# Altium PCB CTRL.PcbDoc
Units mm, origin at the board's own origin, x right, y up, seen from the top; angles counter-clockwise.
Board outline 30 x 23 mm, 2 copper layers (Top Layer, Bottom Layer), stack 1.576 mm thick; 24 components, 19 nets, 74 pads, 114 vias.
Unrouted connection lines stored in the file: 15.
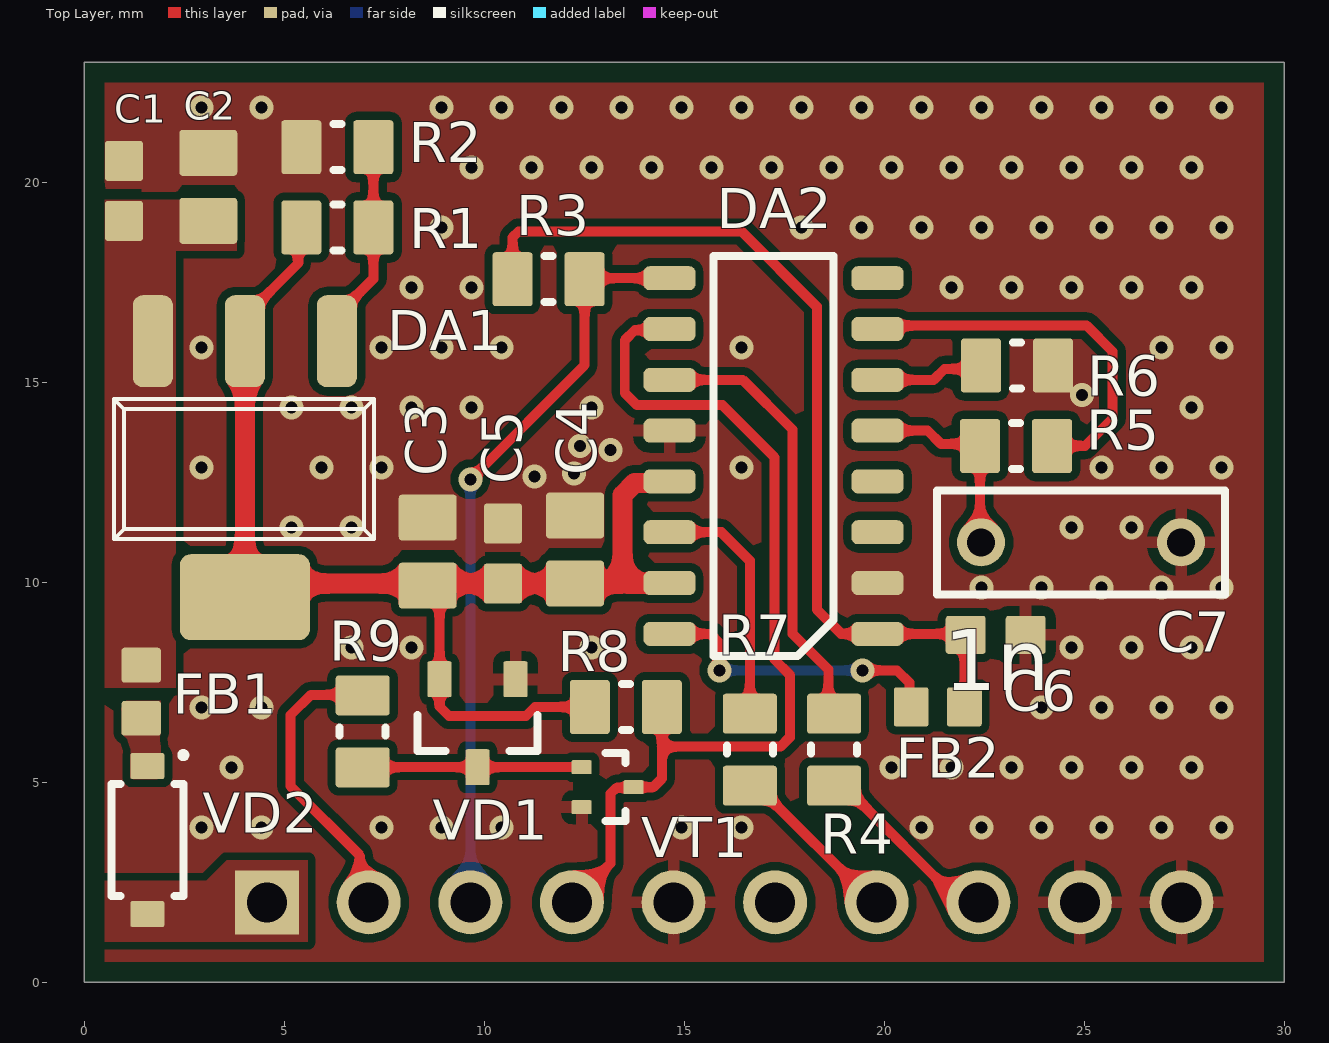
[diagram p0: Top Layer view]
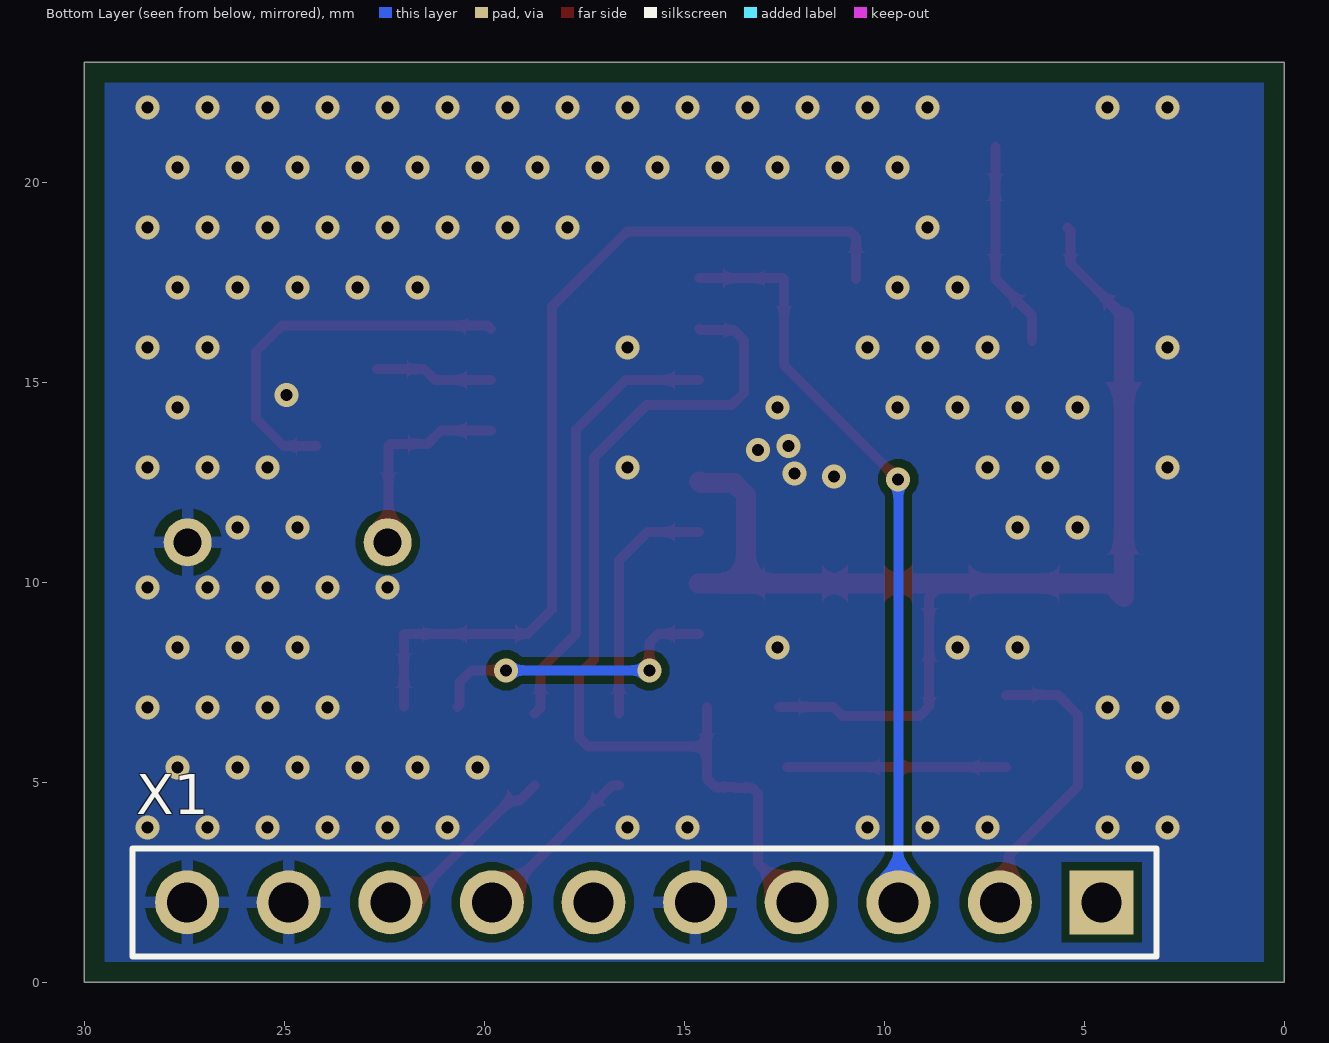
[diagram p1: Bottom Layer view, seen from below]
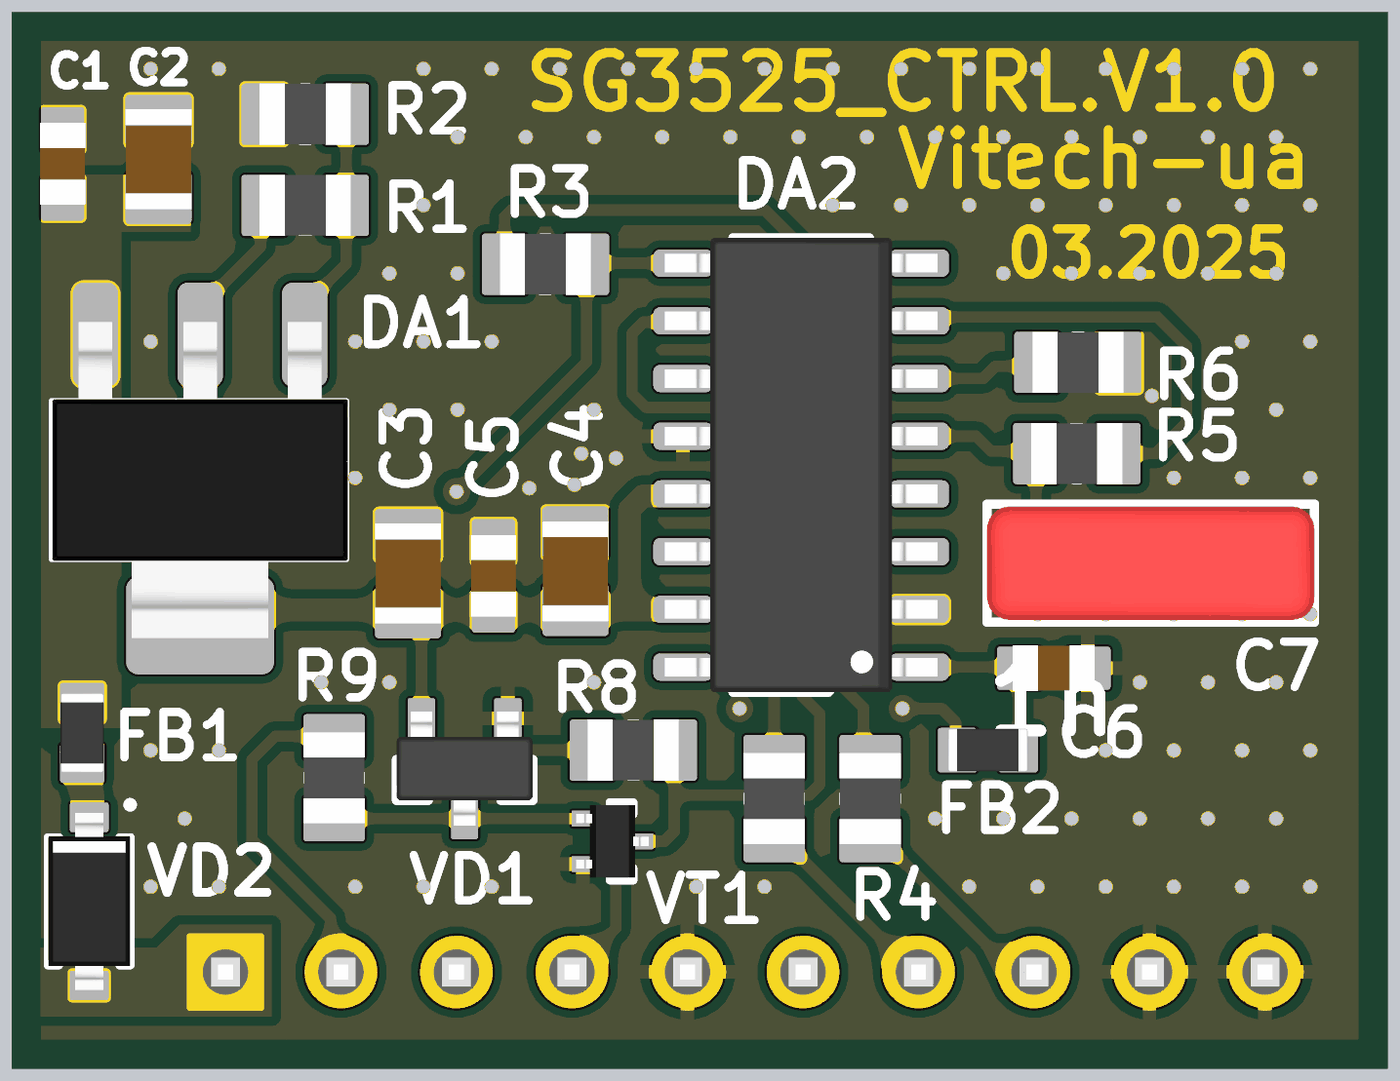
[diagram p2: 3D render of the assembled board from above, using the file's embedded part models]

## Layer stack, top to bottom
Top Solder: solder mask 0.012, Solder Resist, Dk 3.5
Top Layer: signal copper 0.038
Dielectric 1: dielectric 1.5, FR-4, Dk 4.8
Bottom Layer: signal copper 0.038
Bottom Solder: solder mask 0.012, Solder Resist, Dk 3.5

## Board outline
0,0 0,23 30,23 30,0

## Design rules (kind name [scope] priority, off if disabled: settings)
BoardOutlineClearance [All] p1: gap=0.5 ignorepadtopadclearanceinfootprint=FALSE
Clearance MiddleVoltage [InNetClass('MiddleVoltage')] p1: gap=0.5 ignorepadtopadclearanceinfootprint=FALSE except(0: Arc-Hole Track-Hole SMDPad-Hole THPad-Hole Via-Hole Fill-Hole Poly-Hole Region-Hole Text-Hole; 0.2: Arc-Text Track-Text SMDPad-Text THPad-Text Via-Text Fill-Text Poly-Text Region-Text Text-Text)
Clearance HighVoltage [InNetClass('HighVoltage')] p2: gap=1 ignorepadtopadclearanceinfootprint=FALSE except(0: Arc-Hole Track-Hole SMDPad-Hole THPad-Hole Via-Hole Fill-Hole Poly-Hole Region-Hole Text-Hole; 0.2: Arc-Text Track-Text SMDPad-Text THPad-Text Via-Text Fill-Text Poly-Text Region-Text Text-Text)
Clearance Standart [All] p3: gap=0.2 ignorepadtopadclearanceinfootprint=FALSE except(0: Arc-Hole Track-Hole SMDPad-Hole THPad-Hole Via-Hole Fill-Hole Poly-Hole Region-Hole Text-Hole)
ComponentClearance [All] p1: gap=0.1 collisioncheckmode=3 verticalgap=0.1 showdistances=TRUE
Height [All] p1: minheight=0 maxheight=40 prefheight=12.7
HoleSize [All] p1: absolutevalues=TRUE maxlimit=12 minlimit=0.3 maxpercent=80.000 minpercent=20.000
HoleToHoleClearance [All] p1: gap=0.3 allowstackedmicrovias=TRUE
MinimumSolderMaskSliver [All] p1: minsoldermaskwidth=0.1
NetAntennae [All] p1: netantennaetolerance=2
PlaneClearance [All] p1: clearance=0.3
PlaneConnect PlaneConnectMiddleCurrent [InNetClass('MiddleCurrent')] p1: planeconnectstyle=Relief reliefexpansion=0.508 reliefentries=4 reliefconductorwidth=0.5 reliefairgap=0.3
PlaneConnect PlaneHighCurrent [InNetClass('HighCurrent')] p2: planeconnectstyle=Relief reliefexpansion=0.508 reliefentries=4 reliefconductorwidth=0.5 reliefairgap=0.35
PlaneConnect [All] p3: planeconnectstyle=Relief reliefexpansion=0.508 reliefentries=4 reliefconductorwidth=0.3 reliefairgap=0.3
PolygonConnect PolygonConnectMiddleCurrent [All vs InNetClass('MiddleCurrent')] p1: connectstyle=Relief reliefconductorwidth=0.4 reliefentries=4 polygonreliefangle="90 Angle" airgapwidth=0.3
PolygonConnect PolygonHighCurrent [InNetClass('HighCurrent')] p2: connectstyle=Relief reliefconductorwidth=0.5 reliefentries=4 polygonreliefangle="90 Angle" airgapwidth=0.3
PolygonConnect PolygonConnect_Keepout [(ObjectKind = 'Track') And (Layer = 'KeepOutLayer')] p3: connectstyle=Direct reliefconductorwidth=0.254 reliefentries=4 polygonreliefangle="90 Angle" airgapwidth=0.254
PolygonConnect PolygonConnect_Via [IsVia] p4: connectstyle=Direct reliefconductorwidth=0.254 reliefentries=4 polygonreliefangle="90 Angle" airgapwidth=0.254
PolygonConnect [All] p5: thpad.connectstyle=Relief thpad.reliefconductorwidth=0.3 thpad.reliefentries=4 thpad.polygonreliefangle="90 Angle" thpad.airgapwidth=0.25 smdpad.connectstyle=Relief smdpad.reliefconductorwidth=0.3 smdpad.reliefentries=4 smdpad.polygonreliefangle="90 Angle" smdpad.airgapwidth=0.25 via.connectstyle=Direct via.reliefconductorwidth=0.3 via.reliefentries=4 via.polygonreliefangle="90 Angle" via.airgapwidth=0.3
RoutingCorners [All] p1: cornerstyle=45-Degree minsetback=1 maxsetback=3
RoutingVias Power [InNetClass('Power')] p1: holewidth=0.8 width=1.5 viastyle="Through Hole" minholewidth=0.5 minwidth=1 maxholewidth=1.2 maxwidth=3
RoutingVias [All] p2: holewidth=0.4 width=0.8 viastyle="Through Hole" minholewidth=0.3 minwidth=0.6 maxholewidth=0.5 maxwidth=1
SilkToSilkClearance [All] p1: silktosilkclearance=0
SilkToSolderMaskClearance [IsPad] p1: minsilkscreentomaskgap=0.05 clearancetoexposedcopper=TRUE
SolderMaskExpansion SolderMaskExpansion_VIA [IsVia] p1: expansion=-3 istentingtop=TRUE useseparateexpansions=TRUE expansionbottom=-3 istentingbottom=TRUE
SolderMaskExpansion [All] p2: expansion=0.05 istentingtop=FALSE
SupplyNets "Schematic Supply Nets_3" [InNet('+VSG')] p1: voltage=0.000
SupplyNets "Schematic Supply Nets_2" [InNet('GND')] p2: voltage=0.000
SupplyNets "Schematic Supply Nets_1" [InNet('5VREF')] p3: voltage=0.000
SupplyNets "Schematic Supply Nets" [InNet('+VBAT')] p4: voltage=0.000
Width Width_ANT [InNetClass('Anthenna')] p1: maxlimit=1.641 minlimit=0.2 preferedwidth=1.641
Width WidthMiddleCurrent [InNetClass('MiddleCurrent')] p2: maxlimit=2 minlimit=0.35 preferedwidth=0.5
Width WidthHighCurrent [InNetClass('HighCurrent')] p3: maxlimit=5 minlimit=0.5 preferedwidth=1
Width [All] p4: maxlimit=0.5 minlimit=0.2 preferedwidth=0.25
19 further rules are at their usual default settings.

## Components (designator, comment, footprint, x,y, rotation, side; value= is the part's Value field where it differs from the comment)
C1 "0.1uF" C_CERAMIC_0603_MED 0.991,19.787 r90 top
C2 "10uF" CAP-0805(2012)X125T20 3.099,19.888 r90 top
C3 "10uF" CAP-0805(2012)X85T10 8.585,10.77 r90 top
C4 "10uF" CAP-0805(2012)X85T10 12.268,10.82 r90 top
C5 "0.1uF" C_CERAMIC_0603_MED 10.465,10.719 r90 top
C6 "0.1uF" C_CERAMIC_0603_MED 22.784,8.687 r180 top
C7 "1n" "CAP: MKS2 (W=2.50MM)" 24.917,10.998 r180 top
DA1 "LD1117STR" SOT-223 4.013,12.827 r180 top
DA2 "UC3525" SOIC-16 17.23,13.157 r90 top
FB1 "BLM18KG331SH1D" BLM18-Series_H80T15 1.422,7.264 r90 top value="330 Ohms @ 100MHz"
FB2 "BLM18KG331SH1D" BLM18-Series_H80T15 21.336,6.883 r0 top value="330 Ohms @ 100MHz"
R1 "27" R_ANY_CHIP_0805_MED 6.325,18.872 r180 top
R2 "240" R_ANY_CHIP_0805_MED 6.325,20.879 r0 top
R3 "1k" R_ANY_CHIP_0805_MED 11.608,17.577 r180 top
R4 "22" R_ANY_CHIP_0805_MED 18.745,5.817 r270 top
R5 "120" R_ANY_CHIP_0805_MED 23.292,13.411 r180 top
R6 "15k" R_ANY_CHIP_0805_MED 23.317,15.418 r180 top
R7 "22" R_ANY_CHIP_0805_MED 16.637,5.817 r270 top
R8 "15k" R_ANY_CHIP_0805_MED 13.538,6.883 r180 top
R9 "1k" R_ANY_CHIP_0805_MED 6.96,6.274 r90 top
VD1 "BAV99LT3G" SOT-23_MED 9.83,6.477 r90 top
VD2 "1N5819HW" SOD-123_MED 1.575,3.556 r270 top
VT1 "DTC143ZET1G" SOT-416 13.081,4.877 r270 top
X1 "PLS-10 (Part of PLS-40)" DS1021-10S 16,2 r0 bottom

## Footprints (in the part's own frame and the unit in brackets; to place one, negate y for a bottom-side part, rotate by r counter-clockwise, add the part's x,y. Pads: shape width x height; smd on the part's side, far side on the other; paste and mask are expansions set on the pad)
BLM18-Series_H80T15 [mm] "Chip Inductor, 2-Leads, Body 1,60x0,80mm, IPC Medium Density"
  rrect15% 0.87x0.98 smd mask+0.05: 1(-0.665,0) 2(0.665,0)
  body extent -0.87,-0.47 0.88,0.48, height 0.95
C_CERAMIC_0603_MED [mm] "Chip Capacitor, 2-Leads, Body 1,60x0,80mm, IPC Medium Density"
  rrect15% 1x0.95 smd mask+0.05: 1(-0.75,0) 2(0.75,0)
  Top Layer pour cut-out: -0.05,0.45 0.05,0.45 0.05,-0.45 -0.05,-0.45
  body extent -0.9,-0.5 0.9,0.5, height 0.9
CAP-0805(2012)X85T10 [mm] "Chip Capacitor, 2-Leads, Body 2,00x1,25mm, IPC Medium Density"
  rrect15% 1.15x1.45 smd mask+0.05: 1(-0.85,0) 2(0.85,0)
  Top Layer pour cut-out: -0.05,0.651 0.05,0.651 0.05,-0.649 -0.05,-0.649
  body extent -1.1,-0.72 1.1,0.73, height 0.95
CAP-0805(2012)X125T20 [mm] "Chip Capacitor, 2-Leads, Body 2,00x1,25mm, IPC Medium Density"
  rrect15% 1.15x1.45 smd mask+0.05: 1(-0.85,0) 2(0.85,0)
  Top Layer pour cut-out: -0.05,0.651 0.05,0.651 0.05,-0.649 -0.05,-0.649
  body extent -1.1,-0.72 1.1,0.73, height 1.45
"CAP: MKS2 (W=2.50MM)" [mm]
  round 1.2 hole 0.7: 1(-2.5,0) 2(2.5,0)
  silkscreen extent -3.6,-1.3 3.6,1.3, body extent -3.6,-1.25 3.6,1.25, height 6.5
DS1021-10S [mm] "2.54mm 10-pin One Row Male Header, PLS-10"
  rect 1.6x1.6 hole 1: 1(-11.43,0)
  round 1.6 hole 1: 2(-8.89,0) 3(-6.35,0) 4(-3.81,0) 5(-1.27,0) 6(1.27,0) 7(3.81,0) 8(6.35,0) 9(8.89,0) 10(11.43,0)
  silkscreen extent -12.8,-1.35 12.8,1.35, body extent -12.7,-1.27 12.7,1.27, height 8.64
R_ANY_CHIP_0805_MED [mm] "Chip Resistor, 2-Leads, Body 2,00x1,25mm, IPC Medium Density"
  rrect15% 1x1.35 smd: 1(-0.9,0) 2(0.9,0)
  silkscreen extent -0.1,-0.58 0.1,0.58, body extent -1,-0.67 1,0.68, height 0.6
SOD-123_MED [mm] "SOD-123, 2-Leads, Body 1,60x3,71mm, IPC Medium Density"
  rrect15% 0.65x0.85 smd mask+0.05: AN(1.85,0) CA(-1.85,0)
  silkscreen extent -2.2,-0.9 1.4,0.97, body extent -1.95,-0.9 1.95,0.9, height 1.18
SOIC-16 [mm]
  rrect50% 0.6x1.3 smd mask+0.05: 1(-4.445,-2.6) 2(-3.175,-2.6) 3(-1.905,-2.6) 4(-0.635,-2.6) 5(0.635,-2.6) 6(1.905,-2.6) 7(3.175,-2.6) 8(4.445,-2.6) 9(4.445,2.6) 10(3.175,2.6) 11(1.905,2.6) 12(0.635,2.6) 13(-0.635,2.6) 14(-1.905,2.6) 15(-3.175,2.6) 16(-4.445,2.6)
  silkscreen extent -5,-1.5 5,1.5, body extent -5,-3 5,3, height 1.75
SOT-23_MED [mm] "SOT23, 3-Leads, Body 2,92x2,37mm, Pitch 0,95mm, IPC Medium Density"
  rrect15% 0.9x0.6 smd mask+0.05: 1(1.1,-0.95) 2(1.1,0.95) 3(-1.1,0)
  silkscreen extent -0.7,-1.5 0.2,1.5, body extent -1.25,-1.5 1.25,1.5, height 1.1
SOT-223 [mm]
  rrect50% 1x2.3 smd mask+0.05: 1(-2.3,-3.2) 2(0,-3.2) 3(2.3,-3.2)
  rrect25% 3.25x2.15 smd mask+0.05: 4(0,3.2)
  silkscreen extent -3.22,-1.75 3.28,1.75, body extent -3.25,-3.48 3.25,3.48, height 1.68
SOT-416 [mm]
  rrect15% 0.35x0.5 smd mask+0.05: 1(-0.5,-0.65) 2(0.5,-0.65) 3(0,0.65)
  silkscreen extent -0.85,-0.05 0.85,0.45, body extent -0.8,-0.8 0.8,0.8, height 0.78

## Part data
C1 C5 C6: library part CL10B104KB8NNNC, "100nF 50V X7R ±10% 0603 Ceramic Capacitor RoHS", Dielectric Type=X7R, Manufacturer="Samsung Electro-Mechanics", Package=0603, Supplier Part Number 1=1276-1000-2-ND, Temperature Range="-55°C ~ 125°C", Tolerance=±10%, Voltage=50V, Ajax_1C_ID=15653, Ajax_1C_PN="100nF 50V X7R 10% 0603 CL10B104KB8NNNC ceramic capacitor SMD", Ajax_1С_Status="Mass Production", Component Status=Released, Component Type=SMD, ComponentLink1Description=Datasheet, ComponentLink1URL=https://media.digikey.com/pdf/Data%20Sheets/Samsung%20PDFs/CL_Series_MLCC_ds.pdf, GUID_1C=28d36f8f-5d05-11e9-ab4e-0050569f2651, Part Number=CL10B104KB8NNNC, Part Type="Ceramic / X7R / 0603", Price=0.00273, Replacement=CL10B104KB8NNND, Standard Lead Time="18 Weeks", Supplier 1=Digi-Key
C2: library part C2012X5R1V106K125AC, "10uF 35V X5R ±10% 0805 Low ESL Ceramic Capacitor RoHS", Dielectric Type=X5R, Manufacturer="TDK Corporation", Package=0805, Supplier Part Number 1=445-14418-2-ND, Temperature Range="-55°C ~ 85°C", Tolerance=±10%, Voltage=35V, Ajax_1C_ID=29369, Ajax_1C_PN="10uF 35V X5R 10% 0805 C2012X5R1V106K125AC TDK Ceramic Capacitor SMD RoHS", Ajax_1С_Status=Substitution, Component Status=Released, Component Type=SMD, ComponentLink1Description=Datasheet, ComponentLink1URL=https://product.tdk.com/system/files/dam/doc/product/capacitor/ceramic/mlcc/catalog/mlcc_commercial_general_en.pdf, GUID_1C=b7f6aaac-a81d-11eb-ab74-0050569f2651, Part Number=C2012X5R1V106K125AC, Part Type="Ceramic / X5R / 0805", Price=0.04568564, Replacement=NONE, Standard Lead Time="28 Weeks", Supplier 1=Digi-Key
C3 C4: library part C2012X5R1E106M085AC, "10uF 25V X5R ±20% 0805 Ceramic Capacitor RoHS", Dielectric Type=X5R, Manufacturer="TDK Corporation", Package=0805, Supplier Part Number 1=445-14388-1-ND, Temperature Range="-55°C ~ 85°C", Tolerance=±20%, Voltage=25V, Ajax_1C_ID=13798, Ajax_1C_PN="10uF 25V X5R 20% 0805 C2012X5R1E106M085AC Ceramic Capacitor SMD RoHS", Ajax_1С_Status=Substitution, Component Status=Released, Component Type=SMD, ComponentLink1Description=Datasheet, ComponentLink1URL=https://product.tdk.com/info/en/catalog/datasheets/mlcc_commercial_general_en.pdf, GUID_1C=d6f4b954-ba78-11e8-ab45-005056918265, Part Number=C2012X5R1E106M085AC, Part Type="Ceramic / X5R / 0805", Price=0.16, Replacement=NONE, Standard Lead Time="12 Weeks", Supplier 1=Digi-Key
C7: library part CAP_NON_POLAR_THT, "Multilayer Ceramic Capacitors MLCC - SMD/SMT 10 uF 25 VDC 10% 1206 X7R", Manufacturer=Murata, Package=1206, Part Number=GRM31CR71E106KA12L, Tolerance="10 %", Voltage=*V, Component Type=THT, ComponentLink1Description=Datasheet, ComponentLink1URL=https://eu.mouser.com/datasheet/2/281/1/GRM31CR71E106KA12_01CA-1987921.pdf
DA1: "Adjustable Low Drop Positive Voltage Regulator, 1.25V to 15V, 800mA", Manufacturer=STMicroelectronics, Package=SOT-223, Supplier Part Number 1=497-1244-2-ND, Temperature Range="0°C ~ 125°C", Ajax_1C_ID=9610, Ajax_1C_PN="LD1117STR SOT223 стабилизатор", Ajax_1С_Status="Mass Production", Component Status=Released, Component Type=SMD, ComponentLink1Description=Datasheet, ComponentLink1URL=https://www.st.com/content/ccc/resource/technical/document/datasheet/99/3b/7d/91/91/51/4b/be/CD00000544.pdf/files/CD00000544.pdf/jcr:content/translations/en.CD00000544.pdf, GUID_1C=cf96a4d2-0495-11e7-82cc-d8cb8a9acc66, Part Number=LD1117STR, Part Type="Power / Linear Regulator", Price=0.11978409, Replacement=NONE, Standard Lead Time="14 Weeks", Supplier 1=Digi-Key
DA2: "Buck, Push-Pull Regulator Positive Output Step-Down, Step-Up/Step-Down DC-DC Controller IC 16-DIP/16-SOIC", Manufacturer=Texas, Package=DIP16, Part Number=UC3825, Supplier Part Number 1=1727-6049-2-ND, Temperature Range="-40°C ~ 125°C", Component Status=Released, Component Type=SMD, ComponentLink1Description=Datasheet, ComponentLink1URL=https://assets.nexperia.com/documents/data-sheet/74HC_HCT4051.pdf, GUID_1C=956a5446-e932-11eb-ab74-0050569f2651, Part Type="IC REG CTRLR BCK/PUSH-PULL", Price=0.11383574, Replacement=NONE, Standard Lead Time="8 Weeks", Supplier 1=Digi-Key
FB1 FB2: "330 Ohms @ 100 MHz Power Line Ferrite Bead 0603, 1.7A 80mOhm", Current=1.7A, Manufacturer="Murata Electronics", Package=0603, Saturation Current=NONE, Supplier Part Number 1=490-13257-2-ND, Temperature Range="-55°C ~ 125°C", Tolerance=±25%, Ajax_1C_ID=31487, Ajax_1C_PN="330R 1.7A BLM18KG331SH1D 0603 Murata Ferrite Bead", Ajax_1С_Status="RND Only", Component Status=Released, Component Type=SMD, ComponentLink1Description=Datasheet, ComponentLink1URL=https://www.murata.com/en-us/products/productdata/8796737273886/QNFA9101.pdf, GUID_1C=8fa34a67-d98f-11eb-ab74-0050569f2651, Part Number=BLM18KG331SH1D, Part Type="Ferrite Bead", Price=0.0072, Replacement=NONE, Standard Lead Time="15 Weeks", Supplier 1=Digi-Key
R1 R2 R3 R4 R5 R6 R7 R8 R9: library part RC0805JR-0722RL, "22 Ohms ±5%, 1/8W 0805 Thick Film Resistor", Manufacturer=Yageo, Package=0805, Power Rating=0.125W, Temperature Range="-55°C ~ 155°C", Temperature Stability=±100ppm/°C, Tolerance=±5%, Voltage=150V, Ajax_1C_ID=8822, Ajax_1C_PN="22R 5% 0805 Resistors SMD RoHS", Ajax_1С_Status="Mass Production", Component Status=Released, Component Type=SMD, ComponentLink1Description=Datasheet, ComponentLink1URL=https://eu.mouser.com/datasheet/2/447/PYu_RC_Group_51_RoHS_L_10-1664068.pdf, GUID_1C=3ba40fec-5951-11e6-81ec-d8cb8a9acc66, Part Number=RC0805JR-0722RL, Part Type="Thick Film", Price=0.0011, Replacement=NONE
VD1: "Diode Array 1 Pair Series Connection, Standard, 100V, 215mA (DC), SOT-23", Current=215mA, Manufacturer=Onsemi, Package=SOT-23, Supplier Part Number 1=863-BAV99LT3G, Temperature Range="-65°C ~ 150°C", Voltage=100V, Ajax_1C_ID=73369, Ajax_1C_PN="70V 215mA BAV99LT3G SOD-23-3 Onsemi Diode SMD RoHS", Ajax_1С_Status="RND Only", Component Status=Released, Component Type=SMD, ComponentLink1Description=Datasheet, ComponentLink1URL=https://eu.mouser.com/datasheet/2/308/1/BAV99LT1_D-2310219.pdf, GUID_1C=9467e0da-0e79-11ee-a36c-005056994834, Marking="A7 M*", Part Number=BAV99LT3G, Part Type=Array, Price=0.04, Replacement=NONE, Standard Lead Time="36 Weeks", Supplier 1=Mouser, Vf="1.25V @ 150 mA"
VD2: library part BAS116GWJ, "Diode Standart 75V 215mA, SOD-123", Current=0.215A, Manufacturer="Nexperia USA", Package=SOD-123, Supplier Part Number 1=1727-7322-2-ND, Temperature Range="-55°C ~ 150°C", Voltage=75V, Ajax_1C_ID=105914, Ajax_1C_PN="BAS116GWJ 85V 215mA Nexperia diode", Ajax_1С_Status="RND Only", Component Status="On Review", Component Type=SMD, ComponentLink1Description=Datasheet, ComponentLink1URL=https://eu.mouser.com/datasheet/2/916/BAS116GW-1318917.pdf, Marking=GB, Part Number=1N5819HW, Part Type=General, Price=NONE, Replacement=NONE, Standard Lead Time="8 Weeks", Supplier 1=Digi-Key, Vf="1.25 V @ 150 mA"
VT1: "50V, 100mA Low Vce(sat) NPN Digital Transistor, Pre-Biased 4.7k/47k (with built-in resistors)", Manufacturer=Onsemi, Package=SC-75, Supplier Part Number 1=DTC143ZET1GOSTR-ND, Temperature Range="-55°C ~ 150 °C", Ajax_1C_ID=9410, Ajax_1C_PN="DTC143ZET1G SC-75-3  биполярный NPN транзистор", Ajax_1С_Status="Mass Production", Component Status=Released, Component Type=SMD, ComponentLink1Description=Datasheet, ComponentLink1URL=http://www.onsemi.com/pub/Collateral/DTC143Z-D.PDF, GUID_1C=d76ac5d5-de69-11e6-829b-d8cb8a9acc66, Ic=100mA, Part Number=DTC143ZET1G, Part Type=NPN, Price=0.015, Replacement=NONE, Standard Lead Time="8 Weeks", Supplier 1=Digi-Key, Vce=50V
X1: library part DS1021-10SF11, "10 Pin 2.54mm Male Header, Vertical, 3mm and 6.1mm, PLS-5", Manufacturer=Connfly, Temperature Range="-40°C ~ 105°C", Component Status=Released, Component Type=PTH, ComponentLink1Description=Datasheet, ComponentLink1URL=\\altiumdb.ajax.local\files\Datasheet\Connectors\DS1021.pdf, Part Number=DS1021-10SF11, Part Type="Header / Male Pin / Single Row", Price=0.001875, Replacement=NONE, System=Connector

## Via types
v1: diameter 0.6, hole 0.3, Top Layer to Bottom Layer, tented both sides, 114 vias

## Nets (pads, with @x,y where several pads share a name; then routed paths per layer and width w, separated by ;. In a path a pad name is that pad's centre, name@x,y a point inside that pad or via, vN(x,y) a via of type N, cw(c..) or ccw(c..) an arc to the next point about the centre after c; other vN are vias at no path point)
5VREF: C6.2 DA2.1 FB2.2 R3.2 | length 22.8
  Top Layer w0.25: R3.2 10.708,18.624 10.854,18.771 16.434,18.771 18.313,16.891 18.313,9.322 18.923,8.712 22.008,8.712 FB2.2@22.008,6.891
+VBAT: FB1.1 VD2.CA
+VSG: C3.1 C4.1 C5.1 DA1.2 DA1.4 DA2.13 DA2.15 R1.2 R8.2 VD1.2 | length 31.2
  Top Layer w0.25: DA1.2@4.013,16.637 5.345,17.969 5.345,18.792 R1.2 ; C3.1 8.88,9.625 VD1.2 8.88,6.894 9.117,6.657 11.043,6.657 11.269,6.883 R8.2
  Top Layer w0.5: DA1.2@4.013,16.637 DA1.4 4.355,9.969 C5.1 C4.1 ; C4.1 13.459,9.97 ; DA2.13 14.587,12.478 13.751,12.478 13.459,12.185 13.459,9.97 ; DA2.15@14.649,9.97 13.459,9.97
cEN: R9.2 X1.2 | length 7.5
  Top Layer w0.25: R9.2 6.945,7.188 5.664,7.188 5.156,6.68 5.156,4.902 6.883,3.175 6.883,2.227 X1.2
COMP: DA2.9 R3.1 X1.3 | length 18.9
  Top Layer w0.25: v1(9.652,12.573) 12.508,15.429 R3.1 12.533,17.602 DA2.9
  Bottom Layer w0.25: X1.3 9.651,2.001 v1(9.652,12.573) v1(9.652,12.573)
G1: R4.2 X1.8 | length 4.8
  Top Layer w0.25: R4.2 19.12,4.542 19.36,4.542 21.643,2.258 22.092,2.258 X1.8
G2: R7.2 X1.7 | length 4.4
  Top Layer w0.25: R7.2 16.812,4.917 19.729,2 X1.7
GND: C1.2 C2.2 C3.2 C4.2 C5.2 C6.1 C7.1 DA2.2 DA2.12 R2.1 R6.1 VD1.1 VT1.2 X1.5 X1.9 X1.10
  other v1: 2.925,3.876 4.425,3.876 7.425,3.876 8.925,3.876 10.425,3.876 14.925,3.876 16.425,3.876 20.925,3.876 22.425,3.876 23.925,3.876 25.425,3.876 26.925,3.876 28.425,3.876 3.675,5.376 20.175,5.376 21.675,5.376 23.175,5.376 24.675,5.376 26.175,5.376 27.675,5.376 2.925,6.876 4.425,6.876 23.925,6.876 25.425,6.876 26.925,6.876 28.425,6.876 6.675,8.376 8.175,8.376 12.675,8.376 24.675,8.376 26.175,8.376 27.675,8.376 22.425,9.876 23.925,9.876 25.425,9.876 26.925,9.876 28.425,9.876 5.175,11.376 6.675,11.376 24.675,11.376 26.175,11.376 11.252,12.649 12.243,12.725 2.925,12.876 5.925,12.876 7.425,12.876 16.425,12.876 25.425,12.876 26.925,12.876 28.425,12.876 13.157,13.31 12.395,13.411 5.175,14.376 6.675,14.376 8.175,14.376 9.675,14.376 12.675,14.376 27.675,14.376 24.943,14.681 2.925,15.876 7.425,15.876 8.925,15.876 10.425,15.876 16.425,15.876 26.925,15.876 28.425,15.876 8.175,17.376 9.675,17.376 21.675,17.376 23.175,17.376 24.675,17.376 26.175,17.376 27.675,17.376 8.925,18.876 17.925,18.876 19.425,18.876 20.925,18.876 22.425,18.876 23.925,18.876 25.425,18.876 26.925,18.876 28.425,18.876 9.675,20.376 11.175,20.376 12.675,20.376 14.175,20.376 15.675,20.376 17.175,20.376 18.675,20.376 20.175,20.376 21.675,20.376 23.175,20.376 24.675,20.376 26.175,20.376 27.675,20.376 2.925,21.876 4.425,21.876 8.925,21.876 10.425,21.876 11.925,21.876 13.425,21.876 14.925,21.876 16.425,21.876 17.925,21.876 19.425,21.876 20.925,21.876 22.425,21.876 23.925,21.876 25.425,21.876 26.925,21.876 28.425,21.876
NetC1_1: C1.1 C2.1 DA1.3 FB1.2
NetC7_2: C7.2 DA2.5 R5.2 | length 5.2
  Top Layer w0.25: DA2.5 21.082,13.792 21.412,13.462 22.341,13.462 R5.2 22.392,10.998 C7.2
NetDA1_1: DA1.1 R1.1 R2.2 | length 5.2
  Top Layer w0.25: DA1.1 6.313,16.677 7.225,17.588 R1.1 R2.2
NetDA2_6: DA2.6 R6.2 | length 3
  Top Layer w0.25: DA2.6 21.234,15.062 21.506,15.334 R6.2@22.689,15.334
NetDA2_7: DA2.7 R5.1 | length 9.7
  Top Layer w0.25: DA2.7 19.916,16.418 25.06,16.418 25.705,15.773 25.705,14.097 25.019,13.411 R5.1
NetDA2_11: DA2.11 R4.1 | length 11.1
  Top Layer w0.25: DA2.11 16.459,15.062 17.704,13.818 17.704,8.712 18.599,7.817 18.599,6.863 R4.1
NetDA2_14: DA2.14 R7.1 | length 6.1
  Top Layer w0.25: DA2.14 15.926,11.252 16.637,10.541 R7.1
NetDA2_16: DA2.16 FB2.1 | length 7.5
  Top Layer w0.25: DA2.16 15.646,8.712 15.875,8.484 v1(15.875,7.798) ; v1(19.456,7.798) 20.32,7.798 20.625,7.493 20.625,6.93 FB2.1
  Bottom Layer w0.25: v1(15.875,7.798) v1(19.456,7.798)
NetR9_1: R9.1 VD1.3 VT1.1 | length 5.5
  Top Layer w0.25: R9.1 6.963,5.377 VD1.3 12.124,5.377 VT1.1
NetVD2_AN: VD2.AN X1.1
SHDN: DA2.10 R8.1 VT1.3 X1.4 | length 23.8
  Top Layer w0.25: X1.4 13.157,2.967 13.157,4.718 13.304,4.864 13.718,4.864 VT1.3 14.224,4.877 14.438,5.091 14.438,5.892 ; R8.1 14.438,5.892 ; DA2.10 14.603,16.305 13.765,16.305 13.511,16.051 13.511,14.734 13.818,14.427 15.951,14.427 17.254,13.125 17.254,8.07 17.637,7.687 17.637,6.126 17.403,5.892 14.438,5.892
pads on no net: DA2.3 DA2.4 DA2.8 X1.6

## Polygon pours and split planes (outlines as drawn)
GND on Top Layer "TOP_LAYER_GND_P003" (solid, pour order 3): 0,0 30,0 30,23 0,23
+VBAT on Top Layer "TOP_LAYER_+VBAT_P004" (solid, pour order 4): 0.889,7.036 1.905,7.036 1.905,5.156 1.829,5.08 0.965,5.08 0.889,5.156
NetVD2_AN on Top Layer "TOP_LAYER_NETVD2_AN_P001" (solid, pour order 1): 0.508,2.54 3.048,2.54 3.556,3.048 5.588,3.048 5.588,1.016 3.556,1.016 0.508,1.016
NetC1_1 on Top Layer "TOP_LAYER_NETC1_1_P000" (solid, pour order 0): 2.286,7.366 0,7.366 0,19.558 3.81,19.558 3.81,18.288 2.286,18.288
GND on Bottom Layer "BOTTOM_LAYER_GND_P002" (solid, pour order 2): 0,23 30,23 30,0 0,0

## Silkscreen, mask and mechanical layers (free items; w line width, h text height)
Top Solder:
  text "SG3525_CTRL.V1.0" at 11.046,21.025 h1.2
  text "Vitech-ua" at 19.225,19.326 h1.2
  text "03.2025" at 21.638,17.345 h1
Board:
  the board outline again, w0.254
Title:
  lines w0.1: 153.8,119.4 221.75,119.4
  lines w0.127: -89.879,-69.998 -84.799,-69.998 ; -89.879,0.487 -84.799,0.487 ; -89.879,70.972 -84.799,70.972 ; -40.603,-140.483 -40.603,-135.403 ; -40.603,136.377 -40.603,141.457 ; 8.546,-140.483 8.546,-135.403 ; 8.546,136.377 8.546,141.457 ; 57.695,-140.483 57.695,-135.403 ; 57.695,136.377 57.695,141.457 ; 106.971,-140.483 106.971,-135.403 ; 106.971,136.377 106.971,141.457 ; 149.725,-135.375 149.725,-105.375 298.725,-105.375 ; 149.725,-130.375 298.725,-130.375 ; 149.725,-125.375 298.725,-125.375 ; 149.725,-115.375 298.725,-115.375 ; 156.12,-140.483 156.12,-135.403 ; 156.12,136.377 156.12,141.457 ; 164.725,-125.375 164.725,-115.375 ; 205.269,-140.483 205.269,-135.403 ; 205.269,136.377 205.269,141.457 ; 234.725,-135.375 234.725,-125.375 ; 254.545,-140.483 254.545,-135.403 ; 254.545,136.377 254.545,141.457 ; 283.725,-125.375 283.725,-115.375 ; 298.741,-69.998 303.821,-69.998 ; 298.741,0.487 303.821,0.487 ; 298.741,70.972 303.821,70.972 ; -89.879,-140.483 303.821,-140.483 303.821,141.457 -89.879,141.457 -89.879,-140.483 ; -84.799,-135.403 298.741,-135.403 298.741,136.377 -84.799,136.377 -84.799,-135.403
  text "1" at -65.842,138.028 h1.78
  text "2" at -16.803,138.028 h1.78
  text "3" at 32.456,138.028 h1.78
  text "4" at 81.749,138.028 h1.78
  text "5" at 131.025,138.028 h1.78
  text "6" at 180.047,138.028 h1.78
  text "7" at 229.577,138.028 h1.78
  text "8" at 278.599,138.028 h1.78
  text "NOTES: UNLESS OTHERWISE SPECIFIED." at 155.2,120.45 h2.5
  text "1. MATERIAL:BASE MATERIAL LAMINATED EPOXY GLASS (ANY COLOR)" at 155.35,114.4 h2.5
  text "GRADE NEMA FR-4. ALL SIDES 1 OZ COPPER PER MIL-P-13949." at 161.95,109.9 h2.5
  text "AND IS UL APPROVED MFR SOURCE WITH 1.6 mm +-10 PERCENT" at 161.95,106.2 h2.5
  text "A" at -87.974,104.043 h1.78
  text "A" at 300.646,104.043 h1.78
  text "2. SOLDER PLATE PER QQ-S-571." at 155.35,101.9 h2.5
  text "3. SILKSCREEN IS ABSENT." at 155.35,97.9 h2.5
  text "4. DIMENSIONS IN MILLIMETERS, (...) - FOR REFERENCE," at 155.3,93 h2.5
  text "TOLERANCE ARE: +-0.15; HOLES: +- 0.05." at 162.45,88.95 h2.5
  text "5. LIQUID PHOTO IMAGABLE SOLDERMASK ENTHRONE DSR3241" at 155.35,84.9 h2.5
  text "OR ALTERNATIVE." at 162.45,80.95 h2.5
  text "6.  FOR REF ONLY: THIS BOARD HAS SMD ON BOTH SIDES." at 155.35,76.9 h2.5
  text "7.  THE FINISH OF THE BOARD IS HASL." at 155.2,70.5 h2.5
  text "8. PCB stackup:" at 155.2,64.8 h2.5
  text "B" at -87.974,33.431 h1.78
  text "B" at 300.646,33.431 h1.78
  text "C" at -87.974,-37.181 h1.78
  text "C" at 300.646,-37.181 h1.78
  text "D" at -87.974,-107.285 h1.78
  text "D" at 300.646,-107.285 h1.78
  text "TITLE:" at 150.7,-107.8 h1.2
  text "SIZE:" at 150.7,-117.55 h1.2
  text "DWG NO:" at 165.7,-117.55 h1.2
  text "REV:" at 285.2,-117.55 h1.2
  text ".Project_Version" at 290.4,-118.7 h2.5
  text "A3" at 156.7,-122.3 h2.5
  text "DATE:" at 150.7,-127.55 h1.2
  text "PCB DESIGNER:" at 236.2,-127.55 h1.2
  text ".PRINT_DATE" at 164.2,-128.8 h2.5
  text "FILE NAME:" at 150.7,-132.55 h1.2
  text "SHEET:" at 235.95,-132.55 h1.2
  text ".PCB_FILE_NAME_NO_PATH" at 164.2,-133.8 h2.5
  text "1 OF 1" at 253.95,-134.05 h2.5
  text "1" at -65.842,-138.832 h1.78
  text "2" at -16.803,-138.832 h1.78
  text "3" at 32.456,-138.832 h1.78
  text "4" at 81.749,-138.832 h1.78
  text "5" at 131.025,-138.832 h1.78
  text "6" at 180.047,-138.832 h1.78
  text "7" at 229.577,-138.832 h1.78
  text "8" at 278.599,-138.832 h1.78

## Dimensions
0,23 to 0,0 on Dimensions
0,23 to 30,23 on Dimensions